# Altium PCB Main.PcbDoc
Units mil, origin at the board's own origin, x right, y up, seen from the top; angles counter-clockwise.
Board outline 3000 x 3000 mil, 4 copper layers (Top Layer, Power Layer, Ground Layer, Bottom Layer), stack 61.189 mil thick; 4 components, 6 nets, 16 pads, 0 vias.
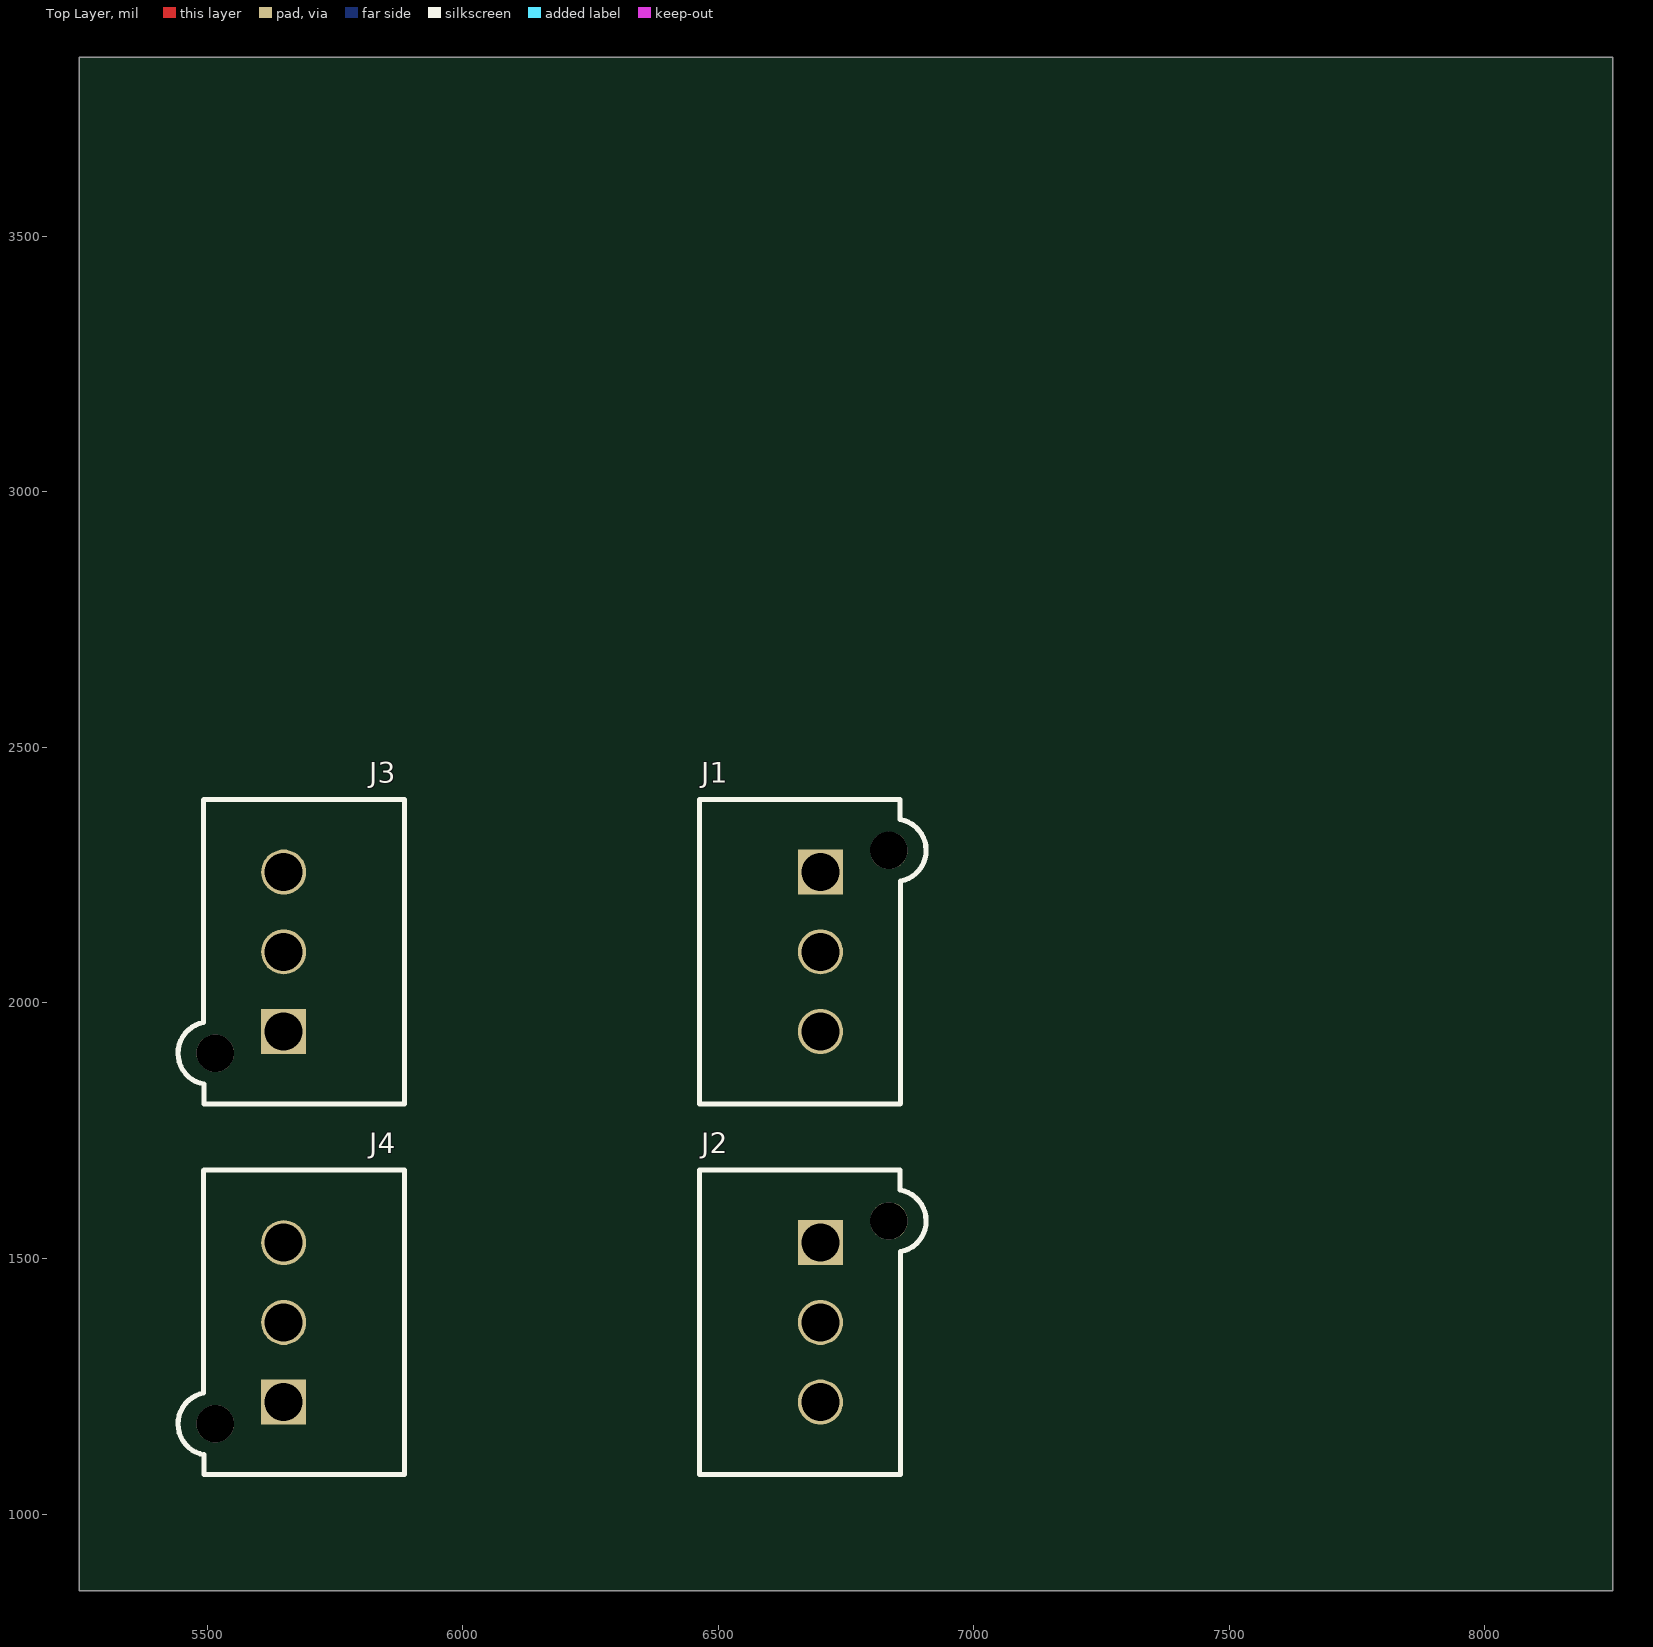
[diagram p0: Top Layer view]
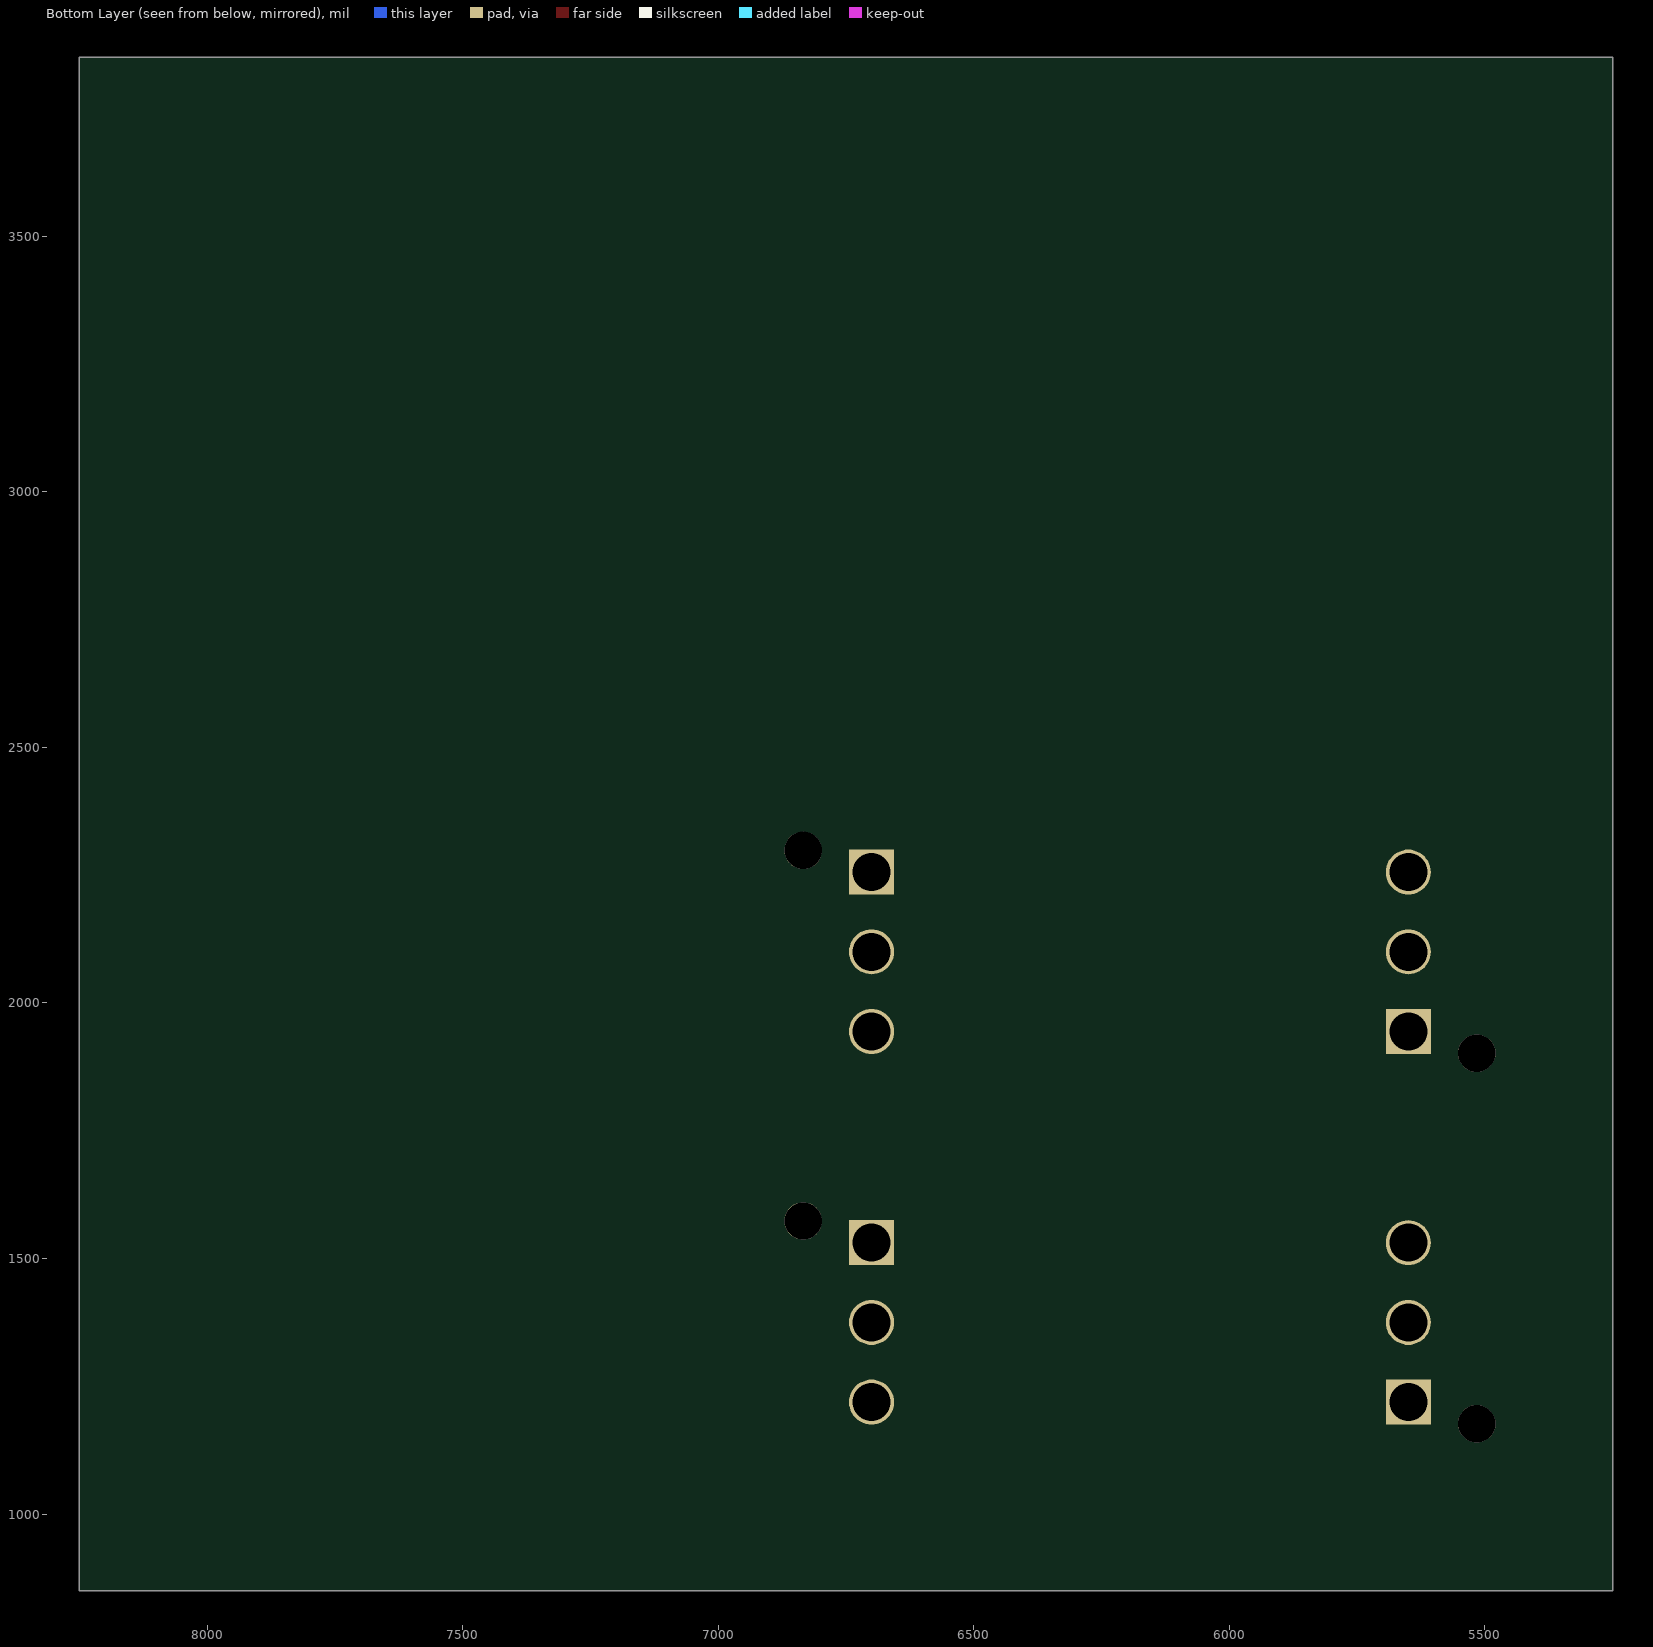
[diagram p1: Bottom Layer view, seen from below]
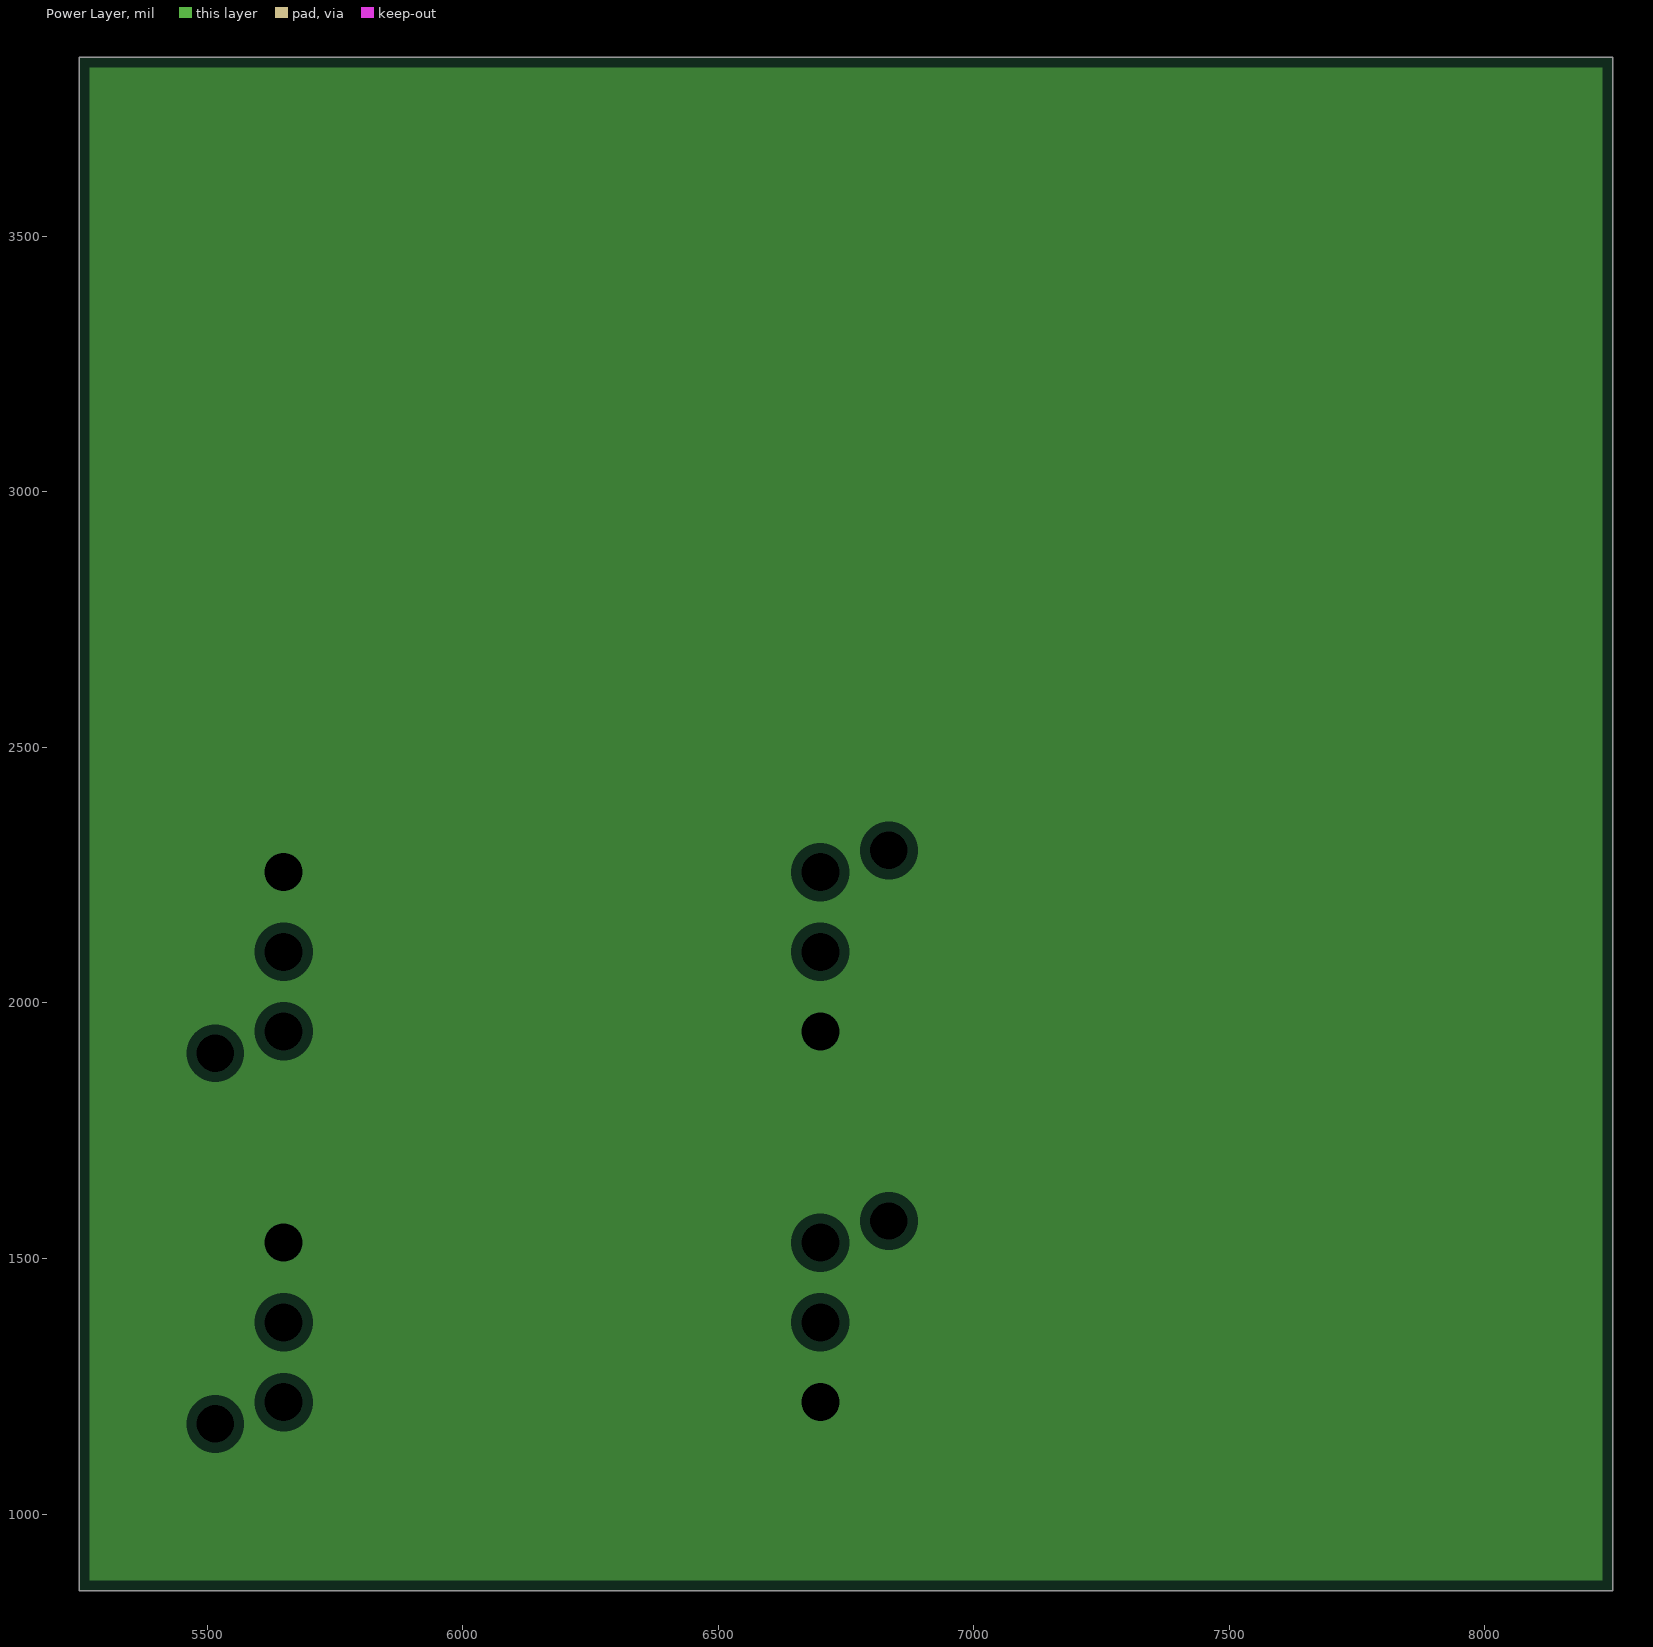
[diagram p2: Power Layer, clearances drawn from the general rule]
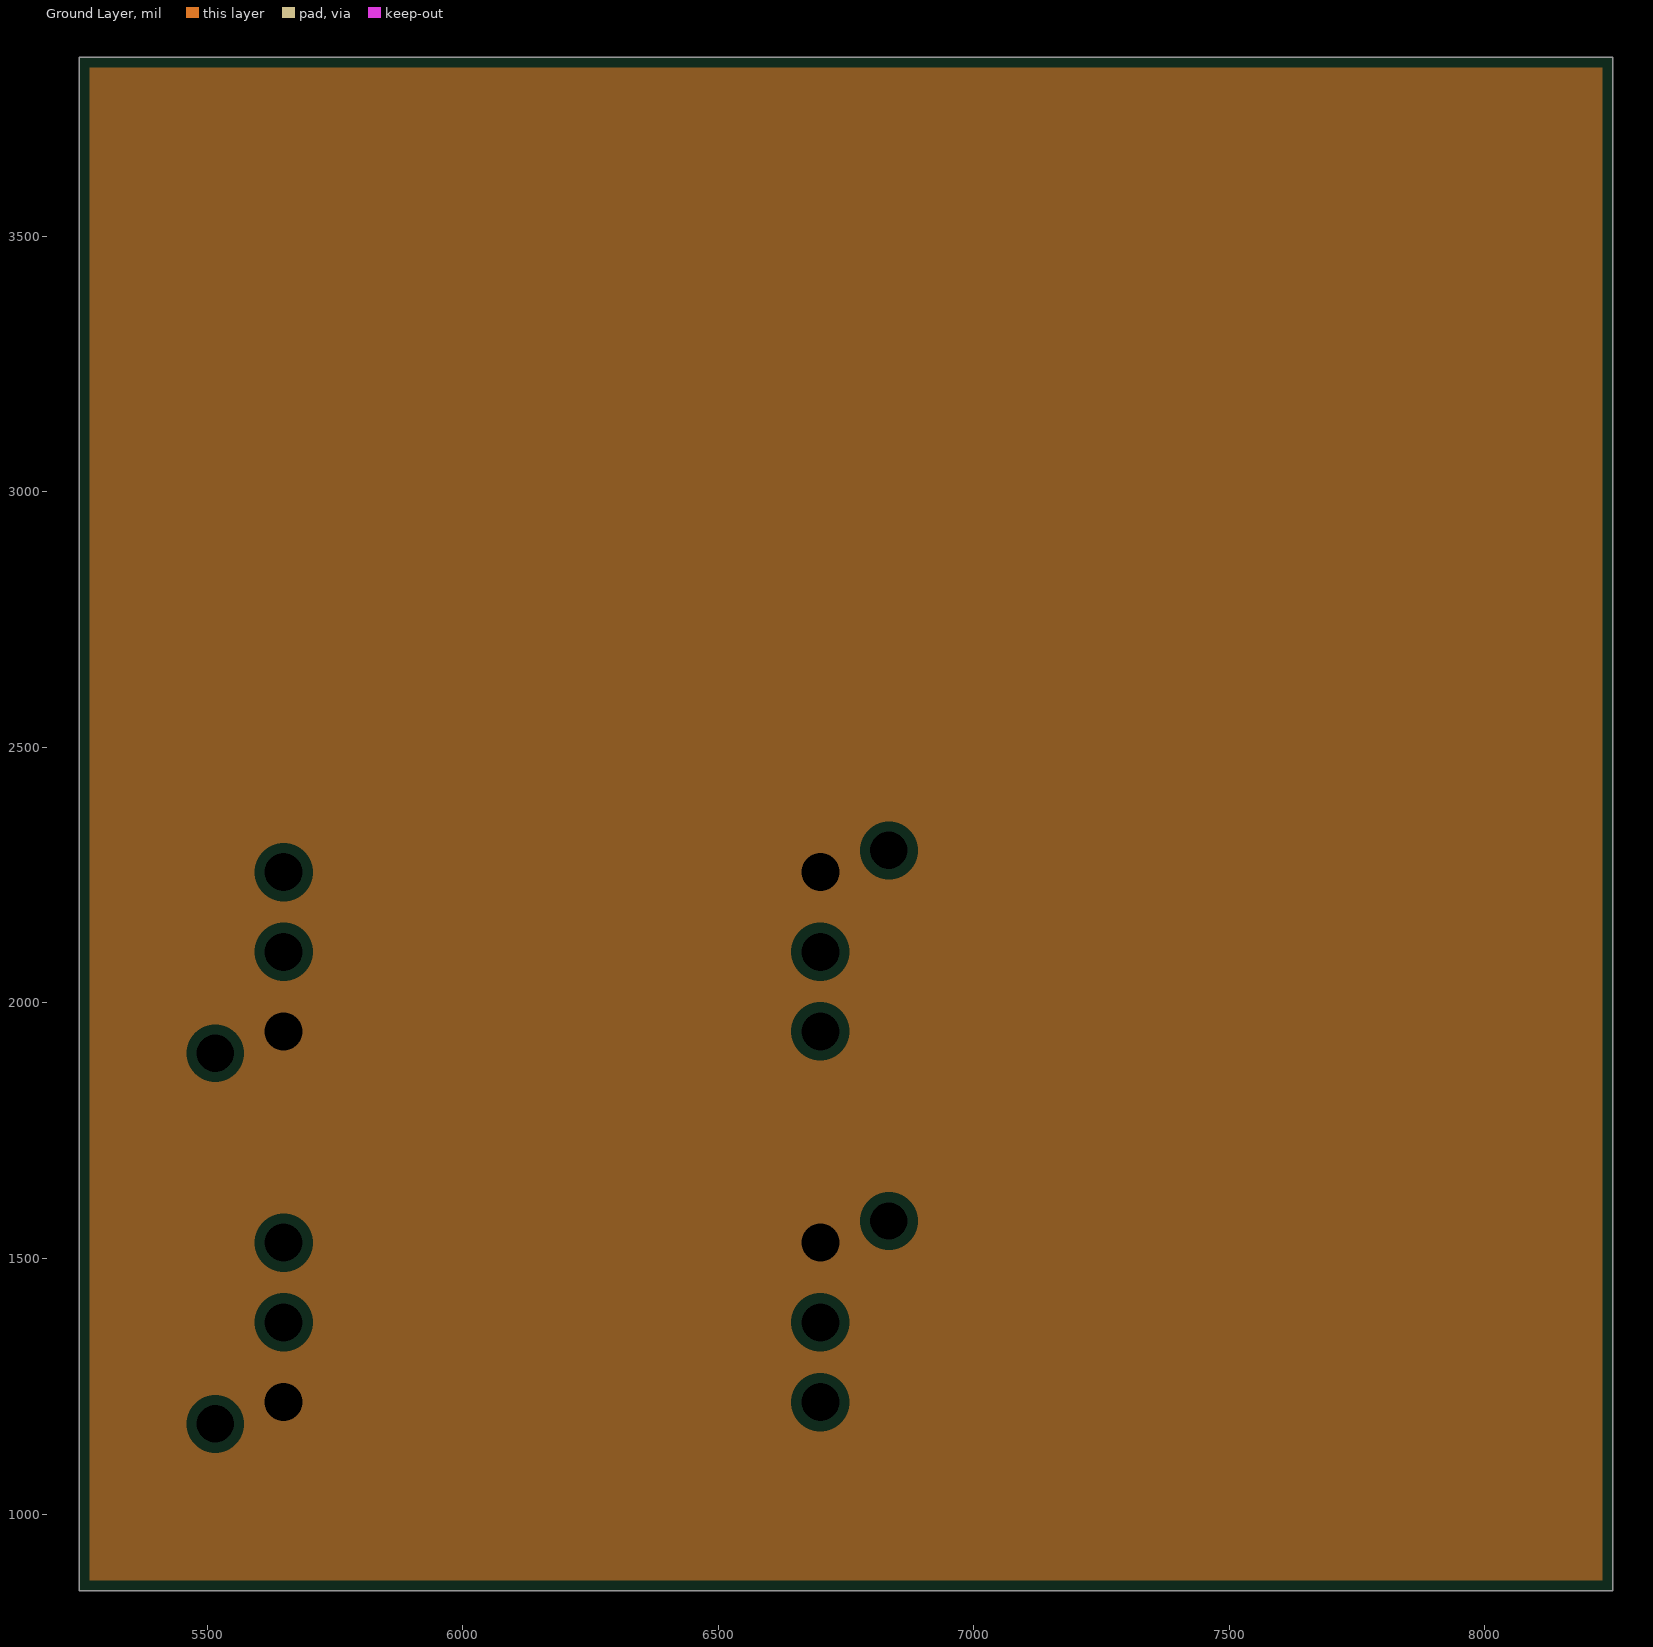
[diagram p3: Ground Layer, clearances drawn from the general rule]
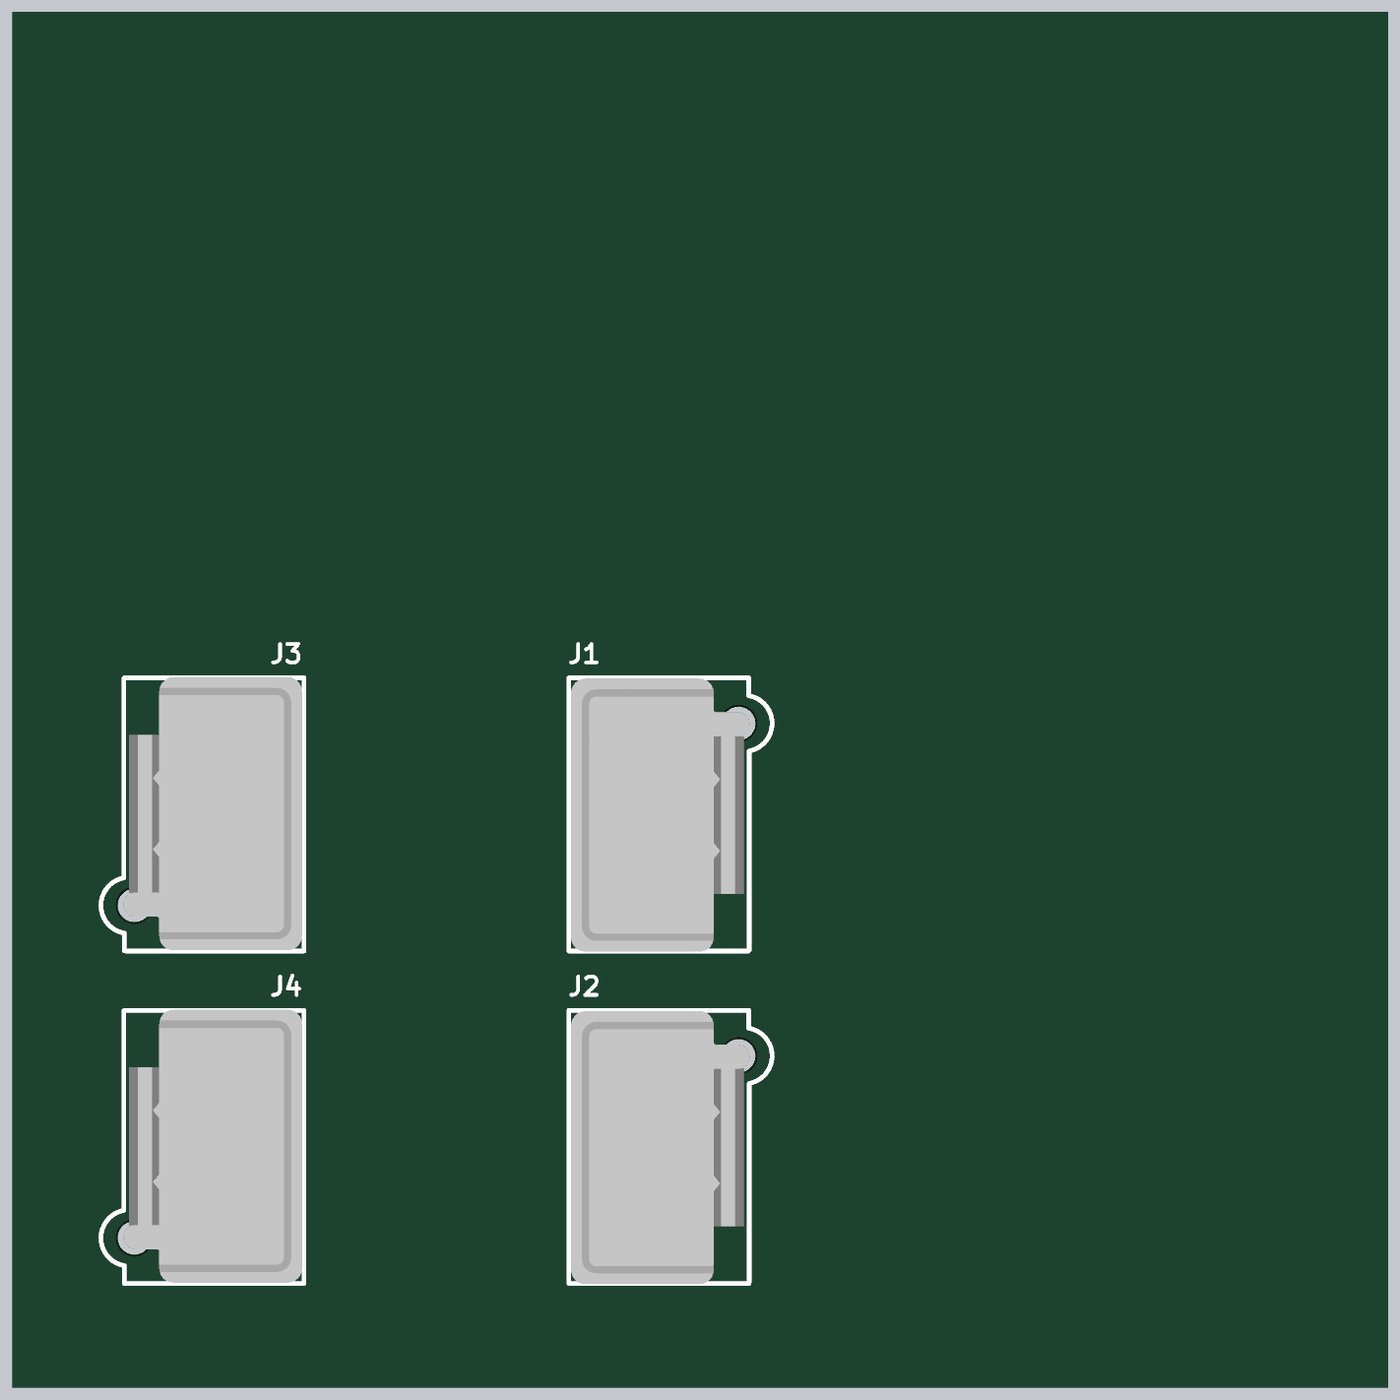
[diagram p4: 3D render of the assembled board from above, using the file's embedded part models]

## Layer stack, top to bottom
Top Solder: solder mask 0.8, SM-002, Dk 4
Top Layer: signal copper 1.378
Dielectric 2: prepreg 8.5827, JLC-PP-001, Dk 4.6
Dielectric 1: prepreg 3.0079, JLC-PP-002, Dk 3.6
Power Layer: plane copper 0.5984, net 3V3
Dielectric 3: core 34.0551, Core-039, Dk 4.8
Ground Layer: plane copper 0.5984, net GND
Dielectric 5: prepreg 3.0079, JLC-PP-002, Dk 3.6
Dielectric 4: prepreg 8.5827, JLC-PP-001, Dk 4.6
Bottom Layer: signal copper 1.378
Bottom Solder: solder mask 0.8, SM-002, Dk 4

## Board outline
5250,850 5250,3850 8250,3850 8250,850

## Design rules (kind name [scope] priority, off if disabled: settings)
Clearance [All] p1: gap=10 ignorepadtopadclearanceinfootprint=FALSE except(0: Arc-Hole Track-Hole SMDPad-Hole THPad-Hole Via-Hole Fill-Hole Poly-Hole Region-Hole Text-Hole)
PlaneClearance [All] p1: clearance=20
PlaneConnect [All] p1: planeconnectstyle=Relief reliefexpansion=20 reliefentries=4 reliefconductorwidth=10 reliefairgap=10
PolygonConnect [All] p1: connectstyle=Relief reliefconductorwidth=10 reliefentries=4 polygonreliefangle="90 Angle" airgapwidth=10
RoutingVias [All] p1: holewidth=28 width=50 viastyle="Through Hole" minholewidth=28 minwidth=50 maxholewidth=28 maxwidth=50
SolderMaskExpansion [All] p1: expansion=4 istentingtop=FALSE
Width [All] p1: maxlimit=10 minlimit=10 preferedwidth=10
28 further rules are at their usual default settings.

## Classes and differential pairs
component class Main: J3 J4

## Components (designator, comment, footprint, x,y, rotation, side; value= is the part's Value field where it differs from the comment)
J1 "1877285-3" 1877285-3 6700,2255.91 r270 top
J2 "1877285-3" 1877285-3 6700,1530.91 r270 top
J3 "1877285-3" 1877285-3 5650,1944.09 r90 top
J4 "1877285-3" 1877285-3 5650,1219.09 r90 top

## Footprints (in the part's own frame and the unit in brackets; to place one, negate y for a bottom-side part, rotate by r counter-clockwise, add the part's x,y. Pads: shape width x height; smd on the part's side, far side on the other; paste and mask are expansions set on the pad)
1877285-3 [mm]
  rect 2.24x2.24 hole 1.89: 1(0,0)
  round 2.24 hole 1.89: 2(3.96,0) 3(7.92,0)
  round 1.86 hole 1.86 unplated: ""(-1.08,3.4)
  silkscreen extent -3.61,-6 11.53,5.25, body extent -3.57,-5.89 11.57,4, height 12.01

## Part data
J1 J2 J3 J4: Supplier Part Number 1=A99846-ND, Supplier 1=Digi-Key

## Nets (pads, with @x,y where several pads share a name; then routed paths per layer and width w, separated by ;. In a path a pad name is that pad's centre, name@x,y a point inside that pad or via, vN(x,y) a via of type N, cw(c..) or ccw(c..) an arc to the next point about the centre after c; other vN are vias at no path point)
3V3: J1.3 J2.3 J3.3 J4.3
GND: J1.1 J2.1 J3.1 J4.1
K_L: J3.2
NP: J1.2
RK_L: J4.2
SP: J2.2
pads on no net: J1. J2. J3. J4.

## Polygon pours and split planes (outlines as drawn)
3V3 on Power Layer (split plane): 8229.9,870.1 5270.1,870.1 5270.1,3829.9 8229.9,3829.9
GND on Ground Layer (split plane): 8229.9,870.1 5270.1,870.1 5270.1,3829.9 8229.9,3829.9